# Altium PCB KOTROLER_TRANSPORTA.PcbDoc (part 1 of 4)
Units mm, origin at the board's own origin, x right, y up, seen from the top; angles counter-clockwise.
Board outline 160 x 100 mm, 2 copper layers (Top Layer, Bottom Layer); 436 components, 440 nets, 1414 pads, 154 vias.
Unrouted connection lines stored in the file: 1.
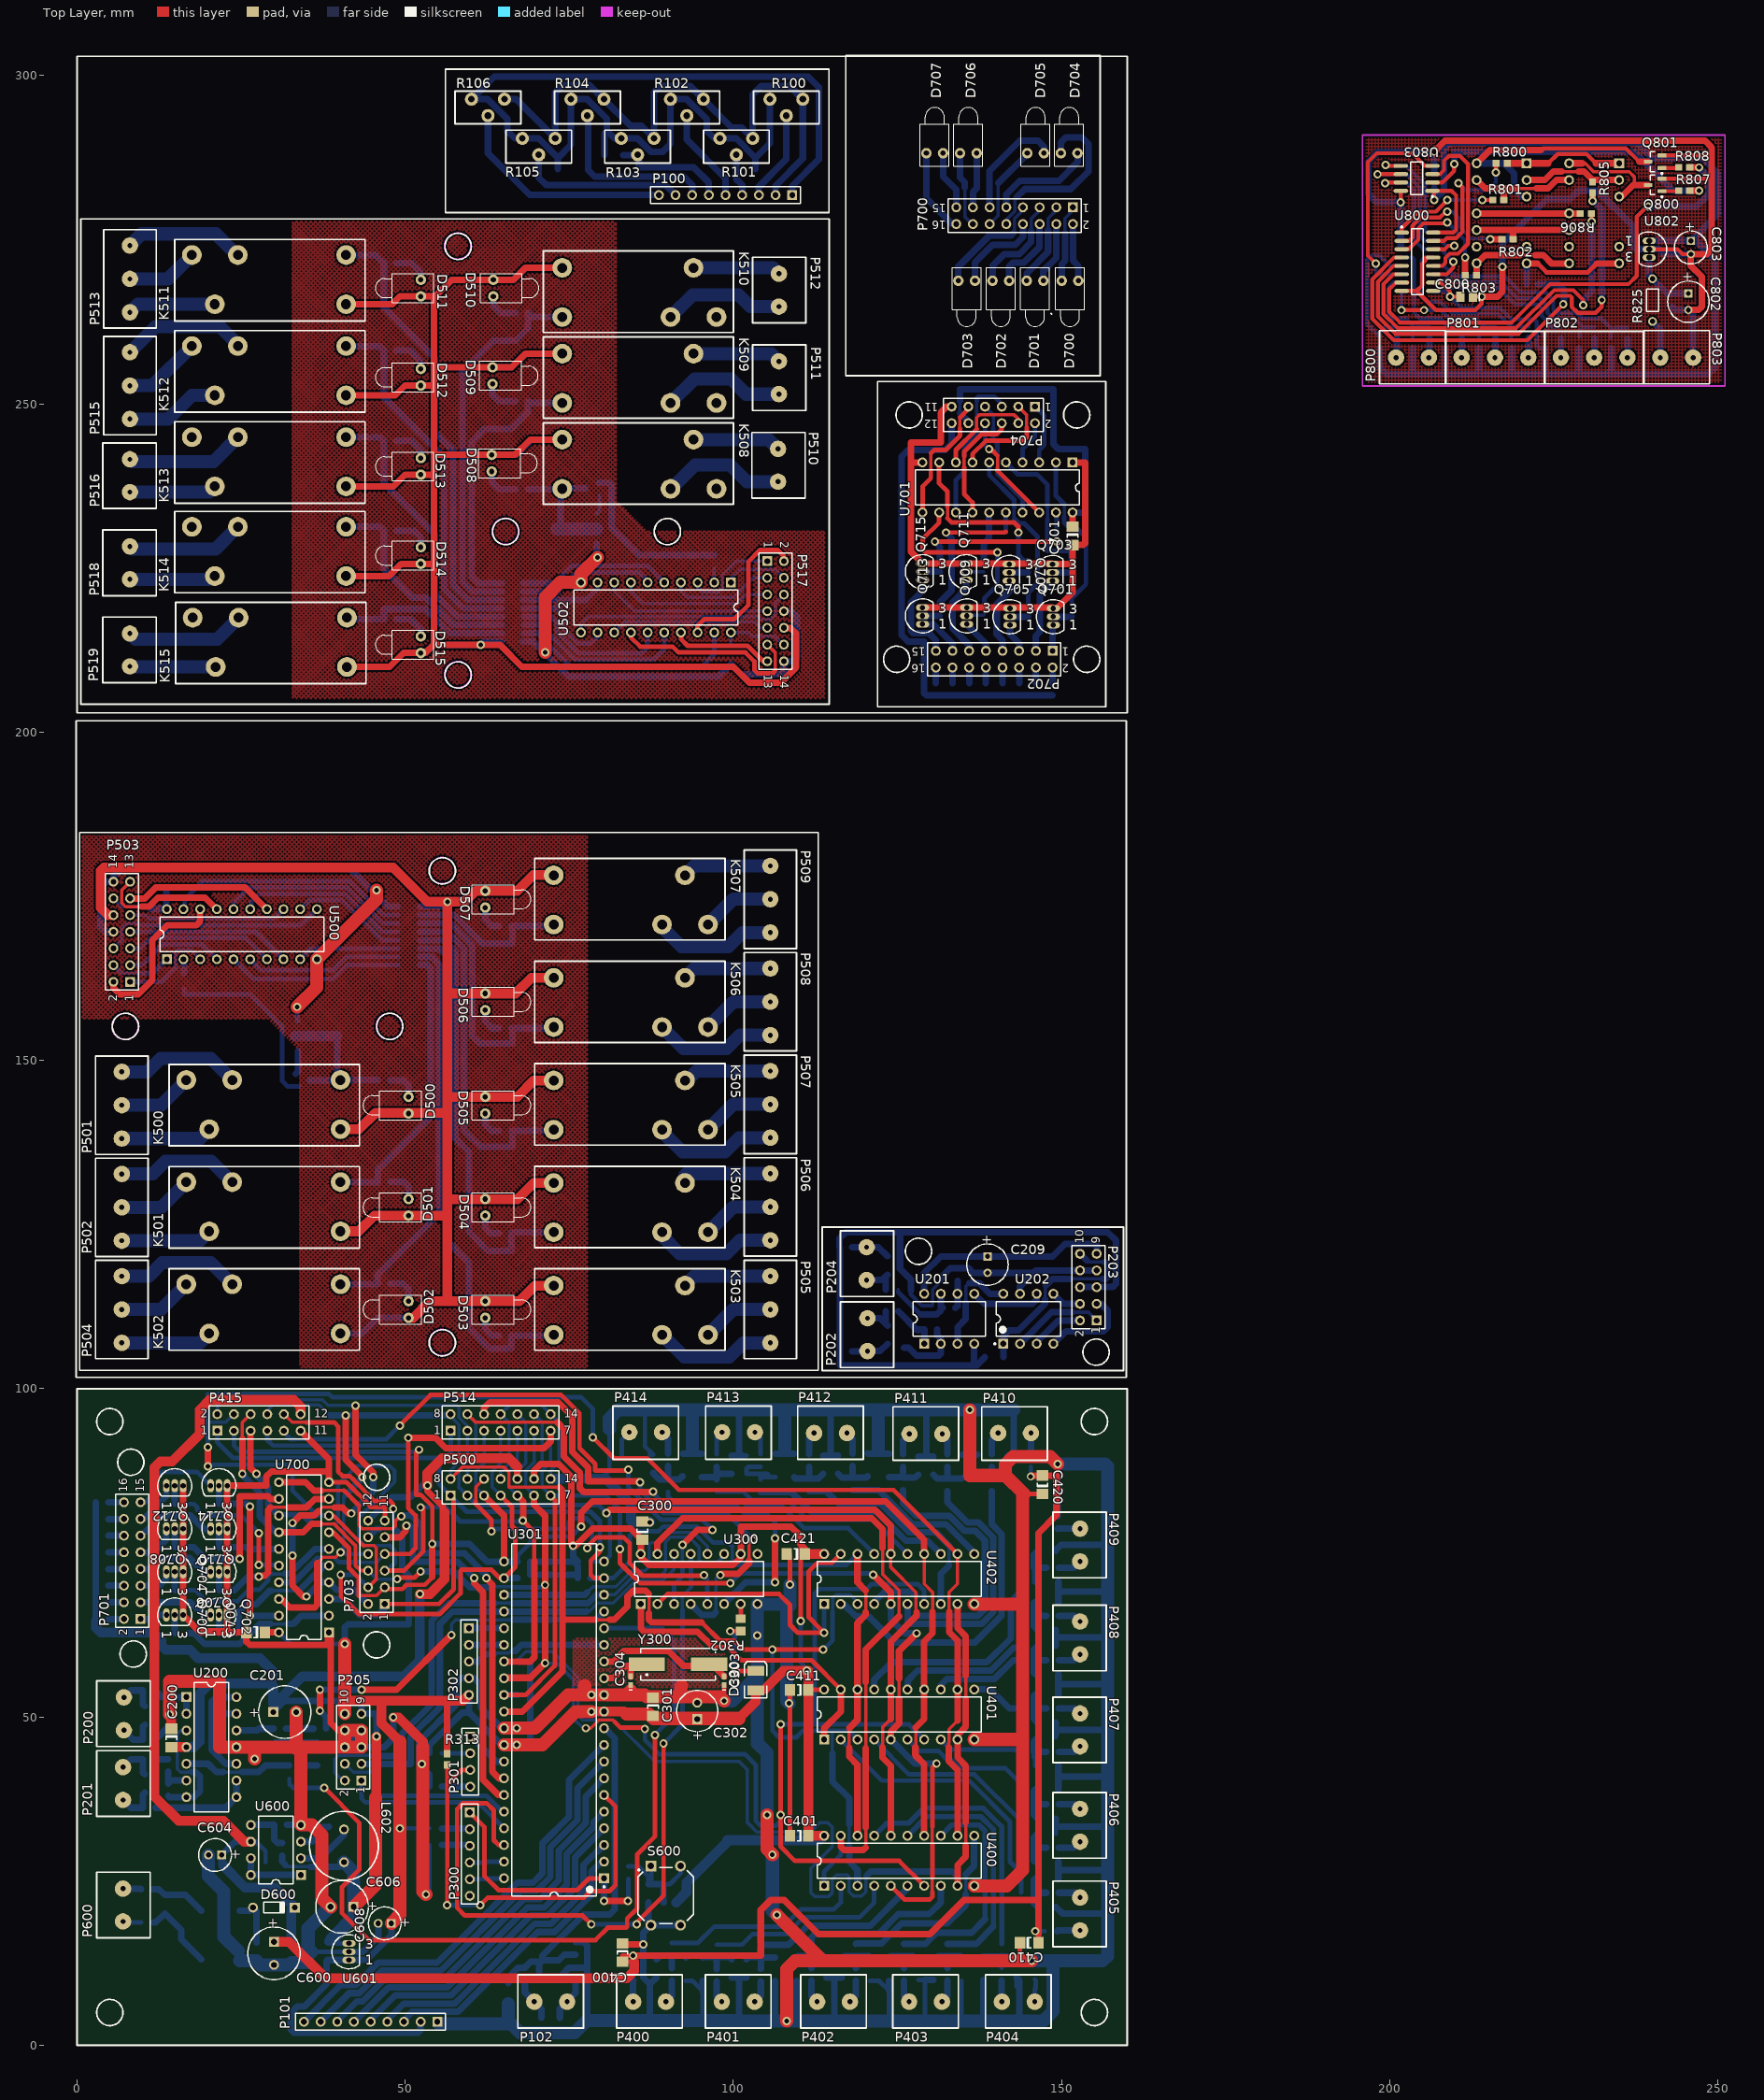
[diagram p0: Top Layer view]
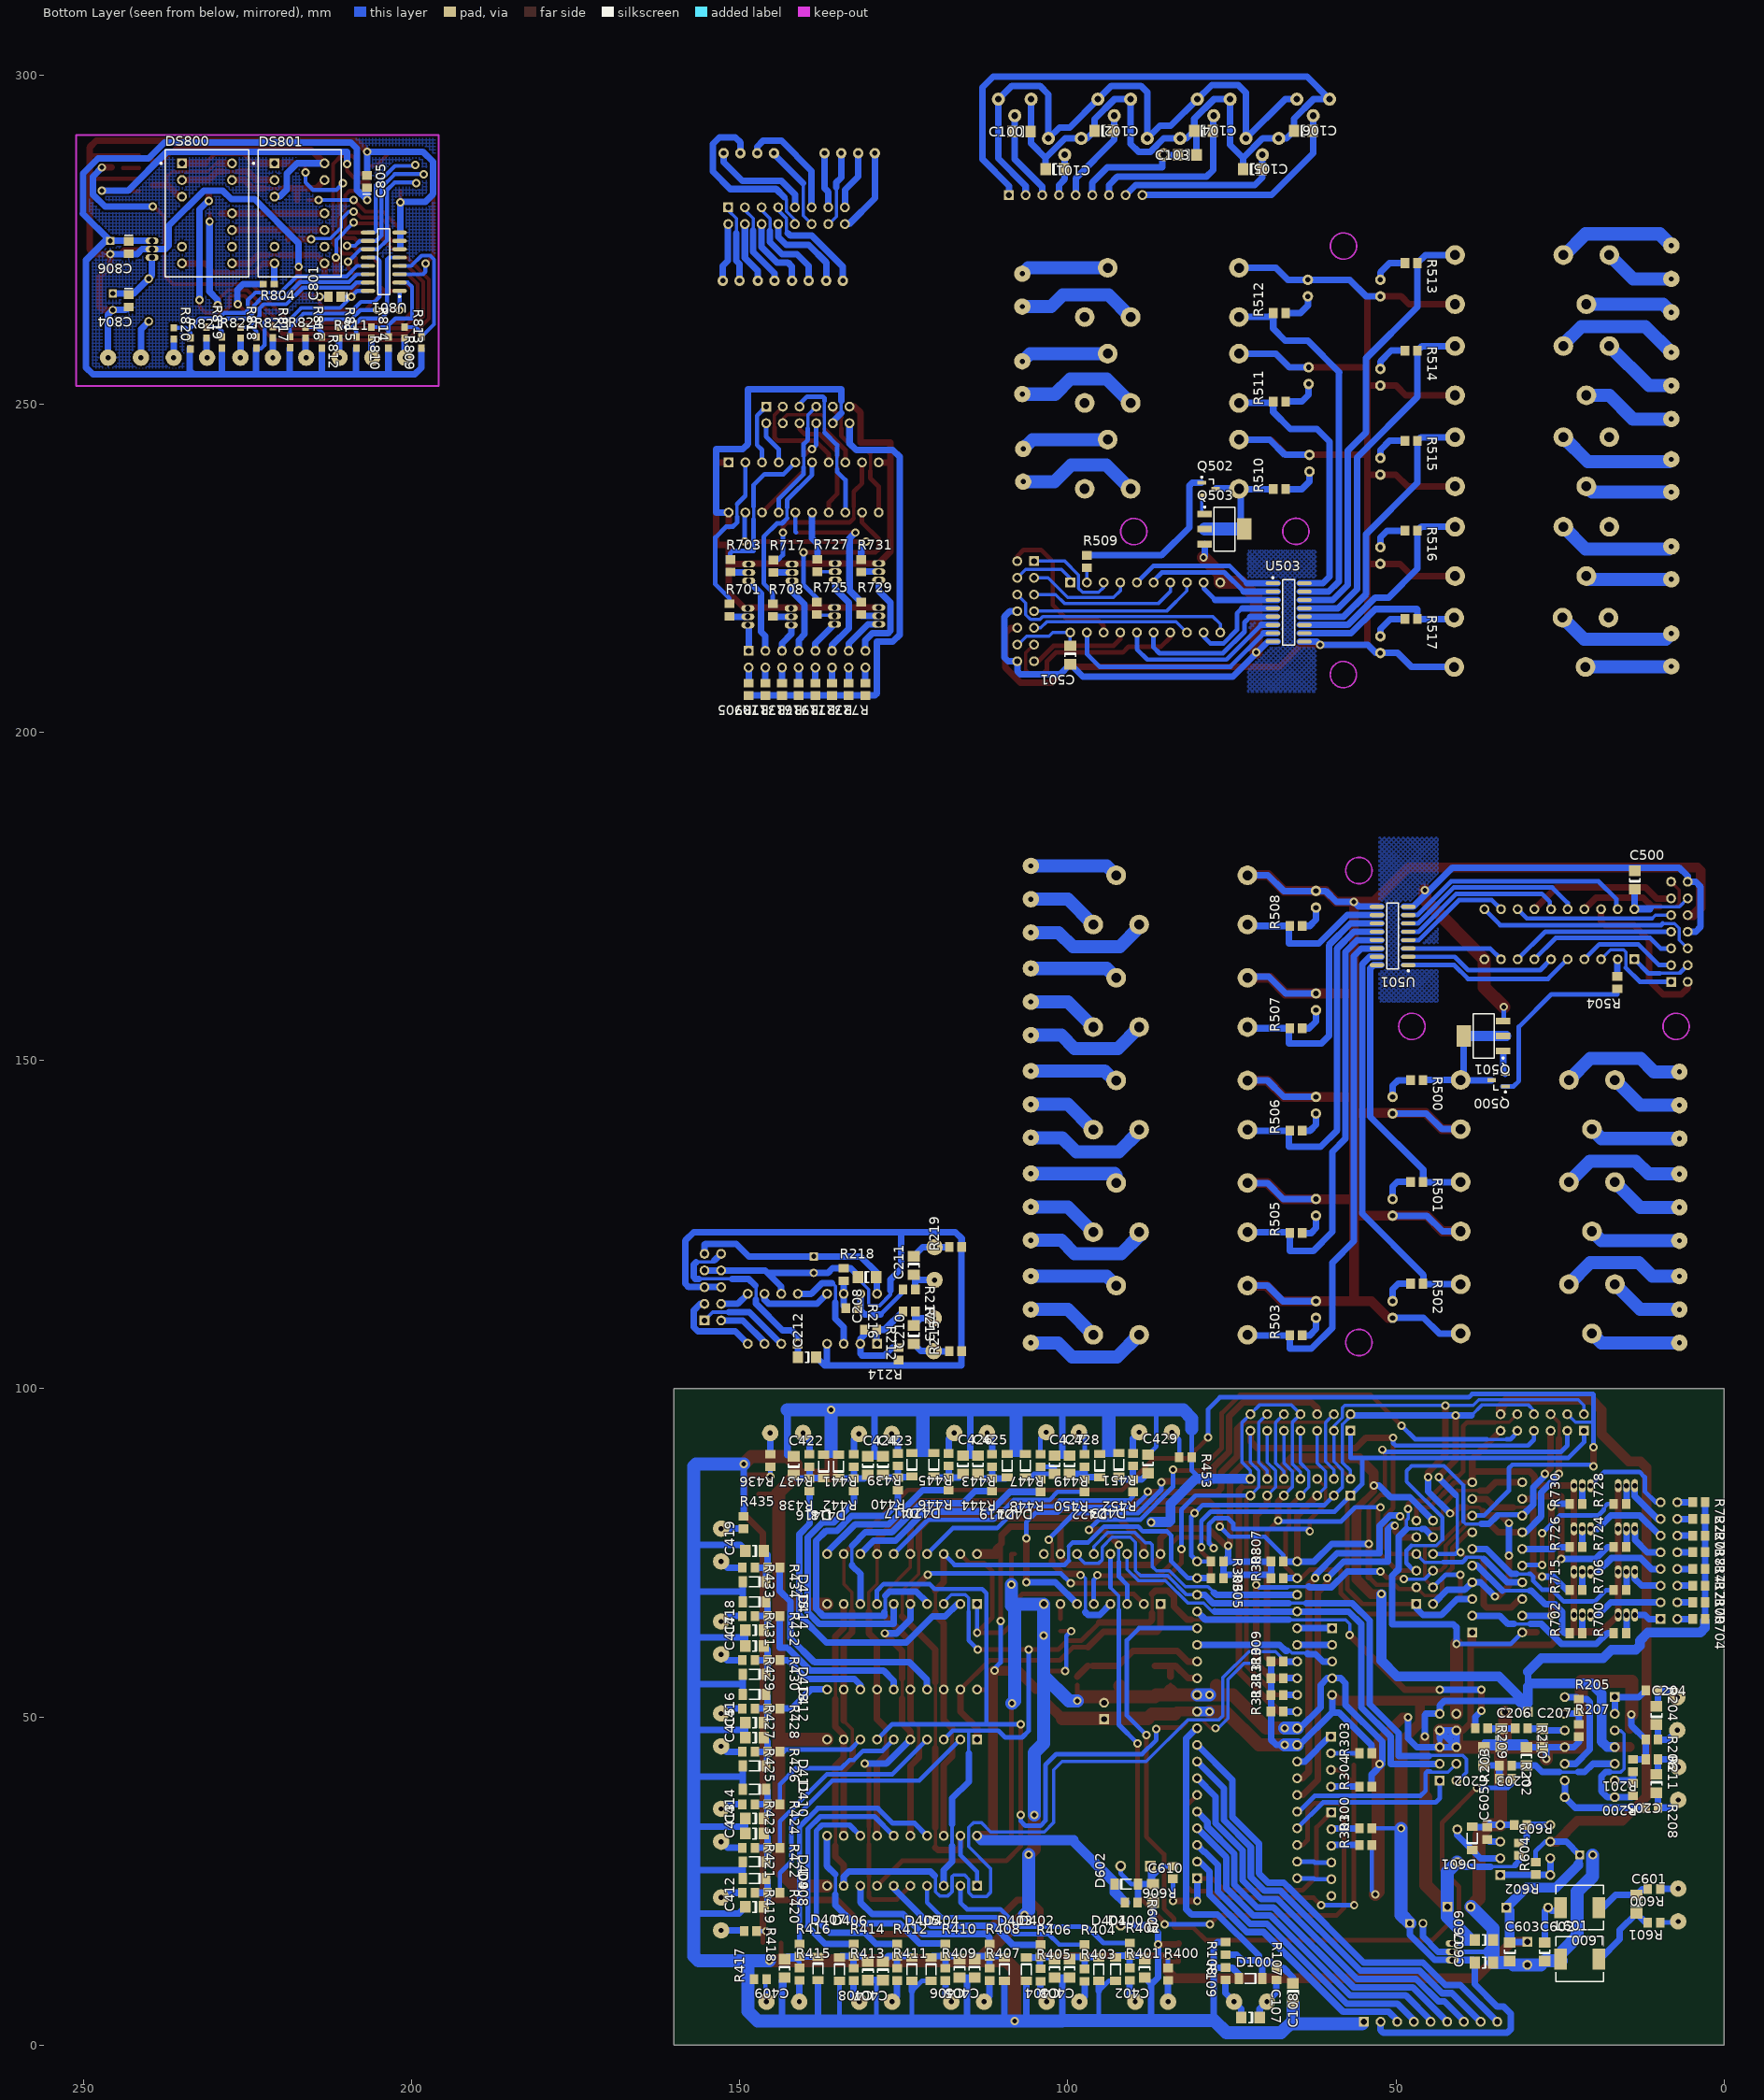
[diagram p1: Bottom Layer view, seen from below]

## Layer stack, top to bottom
Top Solder: solder mask 0.0102, Solder Resist, Dk 3.5
Top Layer: signal copper 0.0356
Dielectric1: dielectric 0.32, FR-4, Dk 4.8
Bottom Layer: signal copper 0.0356
Bottom Solder: solder mask 0.0102, Solder Resist, Dk 3.5

## Board outline
0,100 0,0 160,0 160,100 0,100

## Design rules (kind name [scope] priority, off if disabled: settings)
Clearance [All] p1: gap=0.254
PolygonConnect [All] p1: connectstyle=Relief reliefconductorwidth=0.254 reliefentries=4 polygonreliefangle="90 Angle" airgapwidth=0.254
RoutingVias [All] p1: holewidth=0.711 width=1.27 viastyle="Through Hole" minholewidth=0.711 minwidth=1.27 maxholewidth=0.711 maxwidth=1.27
SilkToSolderMaskClearance SilkscreenOverComponentPads [IsPad] p1: minsilkscreentomaskgap=0.254 clearancetoexposedcopper=TRUE
SolderMaskExpansion [All] p1: expansion=0.102
Width [All] p1: maxlimit=2 minlimit=0.2 preferedwidth=0.5
28 further rules are at their usual default settings.

## Classes and differential pairs
component class ERROR_DISPLAY: C800 C801 C802 C803 C804 C805 C806 DS800 DS801 P800 P801 P802 P803 Q800 Q801 R800 R801 R802 R803 R804 R805 R806 R807 R808 R809 R810 R811 R812 R813 R814 R815 R816 R817 R818 R819 R820 R821 R822 R823 R824 R825 U800 U801 U802 U803
component class SIGNAL_OUTPUT: C700 C701 D700 D701 D702 D703 D704 D705 D706 D707 P700 P701 P702 P703 P704 Q700 Q701 Q702 Q703 Q704 Q705 Q706 Q707 Q708 Q709 Q710 Q711 Q712 Q713 Q714 Q715 R700 R701 R702 R703 R704 R705 R706 R707 R708 R709 R710 R711 R712 R713 R714 R715 R716 R717 R718 R719 R720 R721 R722 R723 R724 R725 R726 R727 R728 R729 R730 R731 U700 U701
component class PSU: C600 C601 C602 C603 C604 C605 C606 C607 C608 C609 C610 D600 D601 D602 L600 L601 L602 P600 R600 R601 R602 R603 R604 R605 R606 S600 U600 U601
component class DIGITAL_OUTPUT: C500 C501 D500 D501 D502 D503 D504 D505 D506 D507 D508 D509 D510 D511 D512 D513 D514 D515 K500 K501 K502 K503 K504 K505 K506 K507 K508 K509 K510 K511 K512 K513 K514 K515 P500 P501 P502 P503 P504 P505 P506 P507 P508 P509 P510 P511 P512 P513 P514 P515 P516 P517 P518 P519 Q500 Q501 Q502 Q503 R500 R501 R502 R503 R504 R505 R506 R507 R508 R509 R510 R511 R512 R513 R514 R515 R516 R517 U500 U501 U502 U503
component class ANALOG_INPUT: C100 C101 C102 C103 C104 C105 C106 C107 C108 D100 P100 P101 P102 R100 R101 R102 R103 R104 R105 R106 R107 R108 R109
component class DIGITAL_INPUT: C400 C401 C402 C403 C404 C405 C406 C407 C408 C409 C410 C411 C412 C413 C414 C415 C416 C417 C418 C419 C420 C421 C422 C423 C424 C425 C426 C427 C428 C429 D400 D401 D402 D403 D404 D405 D406 D407 D408 D409 D410 D411 D412 D413 D414 D415 D416 D417 D418 D419 D420 D421 D422 D423 P400 P401 P402 P403 P404 P405 P406 P407 P408 P409 P410 P411 P412 P413 P414 P415 R400 R401 R402 R403 R404 R405 R406 R407 R408 R409 R410 R411 R412 R413 R414 R415 R416 R417 R418 R419 R420 R421 R422 R423 R424 R425 R426 R427 R428 R429 R430 R431 R432 R433 R434 R435 R436 R437 R438 R439 R440 R441 R442 R443 R444 R445 R446 R447 R448 R449 R450 R451 R452 R453 U400 U401 U402
component class CUC: C300 C301 C302 C303 C304 D300 P300 P301 P302 R300 R301 R302 R303 R304 R305 R306 R307 R308 R309 R310 R311 R312 R313 U300 U301 Y300
component class ANALOG_OUTPUT: C200 C201 C202 C203 C204 C205 C206 C207 C208 C209 C210 C211 C212 P200 P201 P202 P203 P204 P205 R200 R201 R202 R203 R204 R205 R206 R207 R208 R209 R210 R211 R212 R213 R214 R215 R216 R217 R218 R219 U200 U201 U202

## Components (designator, comment, footprint, x,y, rotation, side; value= is the part's Value field where it differs from the comment)
C100 "" 1206 107.061,291.465 r0 bottom
C101 "" 1206 101.981,285.75 r180 bottom
C102 "" 1206 94.53,291.592 r180 bottom
C103 "" 1206 81.788,287.909 r0 bottom
C104 "" 1206 79.333,291.592 r180 bottom
C105 "" 1206 71.882,285.75 r180 bottom
C106 "" 1206 64.135,291.592 r180 bottom
C107 "" 1206 72.169,4.224 r0 bottom
C108 "" 1206 65.692,8.034 r270 bottom
C200 "" 1206 14.384,46.816 r270 top
C201 "10uF" E 31.656,50.753 r0 top
C202 "" 1206 36.609,44.022 r270 bottom
C203 "" 1206 30.132,44.022 r270 bottom
C204 "" 1206 10.32,50.245 r90 bottom
C205 "" 1206 10.32,39.871 r270 bottom
C206 "" 1206 33.942,46.816 r90 bottom
C207 "" 1206 27.719,46.816 r90 bottom
C208 "" 1206 130.589,117 r180 bottom
C209 "10uF" CAPPR2.5-6.3X7 138.717,118.905 r270 top
C210 "" 1206 123.477,108.237 r90 bottom
C211 "" 1206 123.477,118.778 r270 bottom
C212 "" 1206 139.733,104.808 r0 bottom
C300 "" 1206 86.139,78.392 r90 top
C301 "" 1206 87.757,51.562 r270 top
C302 "4u7" 94SP-C 94.488,50.927 r90 top
C303 "" 0402 98.585,55.532 r90 top
C304 "" 0402 84.361,55.532 r90 top
C400 "" 1206 83.091,14.13 r270 top
C401 "" 1206 110.015,31.91 r180 top
C402 "" 1206 88.298,11.717 r270 bottom
C403 "" 1206 99.728,11.717 r270 bottom
C404 "" 1206 102.014,11.717 r270 bottom
C405 "" 1206 114.206,11.717 r270 bottom
C406 "" 1206 116.492,11.717 r270 bottom
C407 "" 1206 128.176,11.336 r270 bottom
C408 "" 1206 130.462,11.336 r270 bottom
C409 "" 1206 143.162,11.717 r270 bottom
C410 "" 1206 145.067,15.618 r0 top
C411 "" 1206 110.015,54.135 r180 top
C412 "" 1206 147.734,21.079 r0 bottom
C413 "" 1206 147.734,32.255 r0 bottom
C414 "" 1206 147.734,34.541 r0 bottom
C415 "" 1206 147.734,46.86 r0 bottom
C416 "" 1206 147.734,49.146 r0 bottom
C417 "" 1206 147.734,60.83 r0 bottom
C418 "" 1206 147.734,63.243 r0 bottom
C419 "" 1206 147.734,75.308 r0 bottom
C420 "" 1206 147.099,85.377 r90 top
C421 "" 1206 109.507,74.836 r180 top
C422 "" 1206 141.765,88.298 r90 bottom
C423 "" 1206 128.176,88.298 r90 bottom
C424 "" 1206 130.462,88.298 r90 bottom
C425 "" 1206 113.698,88.425 r90 bottom
C426 "" 1206 115.984,88.425 r90 bottom
C427 "" 1206 102.014,88.425 r90 bottom
C428 "" 1206 99.728,88.425 r90 bottom
C429 "" 1206 87.79,88.552 r90 bottom
C500 "" 1206 13.622,177.475 r90 bottom
C501 "" 1206 99.63,211.757 r270 bottom
C600 "220uF" E 30.005,14.003 r270 top
C601 "" 1206 13.368,21.496 r90 bottom
C602 "" 1206 27.338,14.257 r90 bottom
C603 "" 1206 32.672,14.257 r90 bottom
C604 "100uF" CAPPR2-5X11 21.028,28.989 r180 top
C605 "" 0805 36.101,32.291 r270 bottom
C606 "220uF" E 40.386,21.082 r180 top
C607 "" 1206 36.609,12.606 r0 bottom
C608 "470uF" CAPPR2-5X11 46.896,18.575 r180 top
C609 "" 1206 36.609,16.035 r0 bottom
C610 "" 1206 87.028,23.147 r90 bottom
C700 "" 1206 27.211,62.898 r180 top
C701 "" 1206 151.671,229.903 r270 top
C800 "" 0805 211.709,266.319 r180 top
C801 "" 0805 211.709,266.319 r0 bottom
C802 "100uF" C 245.491,265.557 r270 top
C803 "4u7" B 245.872,273.812 r270 top
C804 "" 0805 243.078,265.684 r270 bottom
C805 "" 0805 206.756,283.845 r90 bottom
C806 "" 0805 243.078,273.812 r270 bottom
D100 "5V1" SOD80C 72.169,10.193 r180 bottom
D300 "STATUS" 3.5X2.8X1.9 103.411,55.532 r90 top
D400 "5V1" SOD80C 92.743,11.59 r90 bottom
D401 "5V1" SOD80C 95.283,11.59 r90 bottom
D402 "5V1" SOD80C 106.332,11.59 r90 bottom
D403 "5V1" SOD80C 109.634,11.59 r90 bottom
D404 "5V1" SOD80C 120.81,11.59 r90 bottom
D405 "5V1" SOD80C 123.731,11.59 r90 bottom
D406 "5V1" SOD80C 134.78,11.59 r90 bottom
D407 "5V1" SOD80C 138.082,11.717 r90 bottom
D408 "5V1" SOD80C 147.734,25.397 r180 bottom
D409 "5V1" SOD80C 147.734,27.937 r180 bottom
D410 "5V1" SOD80C 147.734,38.986 r180 bottom
D411 "5V1" SOD80C 147.734,42.542 r180 bottom
D412 "5V1" SOD80C 147.734,53.464 r180 bottom
D413 "5V1" SOD80C 147.734,56.512 r180 bottom
D414 "5V1" SOD80C 147.734,67.561 r180 bottom
D415 "5V1" SOD80C 147.734,70.609 r180 bottom
D416 "5V1" SOD80C 137.193,88.171 r270 bottom
D417 "5V1" SOD80C 123.731,88.425 r270 bottom
D418 "5V1" SOD80C 134.907,88.171 r270 bottom
D419 "5V1" SOD80C 109.253,88.298 r270 bottom
D420 "5V1" SOD80C 120.429,88.425 r270 bottom
D421 "5V1" SOD80C 106.459,88.298 r270 bottom
D422 "5V1" SOD80C 95.156,88.298 r270 bottom
D423 "5V1" SOD80C 92.235,88.425 r270 bottom
D500 "LED1" LED-1 50.516,143.185 r180 top
D501 "LED1" LED-1 50.516,127.628 r180 top
D502 "LED1" LED-1 50.516,112.07 r180 top
D503 "LED1" LED-1 62.2,112.07 r0 top
D504 "LED1" LED-1 62.2,127.628 r0 top
D505 "LED1" LED-1 62.2,143.185 r0 top
D506 "LED1" LED-1 62.2,158.933 r0 top
D507 "LED1" LED-1 62.2,174.554 r0 top
D508 "LED1" LED-1 63.181,240.967 r0 top
D509 "LED1" LED-1 63.308,254.302 r0 top
D510 "LED1" LED-1 63.435,267.637 r0 top
D511 "LED1" LED-1 52.386,267.637 r180 top
D512 "LED1" LED-1 52.386,254.061 r180 top
D513 "LED1" LED-1 52.386,240.484 r180 top
D514 "LED1" LED-1 52.386,226.908 r180 top
D515 "LED1" LED-1 52.386,213.331 r180 top
D600 "BAT85" SOD68 30.005,20.988 r0 top
D601 "BAV102" SOD80C 38.387,31.529 r270 bottom
D602 "BAV102" SOD80C 91.092,24.544 r0 bottom
D700 "FEEDER 1" LED-1 151.29,268.754 r270 top
D701 "FEEDER 2" LED-1 145.956,268.754 r270 top
D702 "FEEDER 3" LED-1 140.749,268.754 r270 top
D703 "FEEDER 4" LED-1 135.542,268.754 r270 top
D704 "FEEDER 5" LED-1 151.163,288.185 r90 top
D705 "FEEDER KOEX." LED-1 146.041,288.185 r90 top
D706 "VAKUM PUMPA 1" LED-1 135.796,288.185 r90 top
D707 "CIKLON" LED-1 130.674,288.185 r90 top
DS800 "5082-7653" E-11(R) 231.14,279.019 r180 bottom
DS801 "5082-7653" E-11(R) 217.043,279.019 r180 bottom
K500 "40.31" "40.31 FINDER" 43.15,149.485 r180 top
K501 "40.31" "40.31 FINDER" 43.15,133.928 r180 top
K502 "40.31" "40.31 FINDER" 43.15,118.37 r180 top
K503 "40.31" "40.31 FINDER" 69.629,105.77 r0 top
K504 "40.31" "40.31 FINDER" 69.629,121.391 r0 top
K505 "40.31" "40.31 FINDER" 69.629,137.012 r0 top
K506 "40.31" "40.31 FINDER" 69.629,152.633 r0 top
K507 "40.31" "40.31 FINDER" 69.629,168.254 r0 top
K508 "40.31" "40.31 FINDER" 70.928,234.617 r0 top
K509 "40.31" "40.31 FINDER" 70.928,247.698 r0 top
K510 "40.31" "40.31 FINDER" 70.928,260.779 r0 top
K511 "40.31" "40.31 FINDER" 44.004,275.13 r180 top
K512 "40.31" "40.31 FINDER" 44.004,261.255 r180 top
K513 "40.31" "40.31 FINDER" 44.004,247.381 r180 top
K514 "40.31" "40.31 FINDER" 44.004,233.728 r180 top
K515 "40.31" "40.31 FINDER" 44.131,219.885 r180 top
L600 "" PCMC063T 22.004,20.988 r0 bottom
L601 "" PCMC063T 22.004,13.114 r180 bottom
L602 "" RB5-10.5 40.673,30.386 r270 top
P100 "Header 9" HDR1X9 108.966,281.813 r180 top
P101 "Header 9" HDR1X9 54.897,3.589 r180 top
P102 "AN0" "TERMINAL BLOK 2" 72.169,6.637 r90 top
P200 "AN1" "TERMINAL BLOK 2" 7.145,50.499 r180 top
P201 "AN0" "TERMINAL BLOK 2" 7.018,39.871 r0 top
P202 "AN2" "TERMINAL BLOK 2" 120.429,108.237 r180 top
P203 "Header 5X2" HDR2X5 155.354,110.396 r90 top
P204 "AN3" "TERMINAL BLOK 2" 120.302,119.061 r0 top
P205 "Header 5X2" HDR2X5 43.34,40.339 r90 top
P300 "Header 6" HDR1X6 59.85,35.466 r270 top
P301 "Header 4" HDR1X4 59.914,47.023 r270 top
P302 "Header 5" HDR1X5 59.723,63.533 r270 top
P400 "Terminal blok 2 pina" "TERMINAL BLOK 2" 87.228,6.637 r90 top
P401 "Terminal blok 2 pina" "TERMINAL BLOK 2" 100.735,6.637 r90 top
P402 "Terminal blok 2 pina" "TERMINAL BLOK 2" 115.258,6.637 r90 top
P403 "Terminal blok 2 pina" "TERMINAL BLOK 2" 129.274,6.637 r90 top
P404 "Terminal blok 2 pina" "TERMINAL BLOK 2" 143.416,6.637 r90 top
P405 "Terminal blok 2 pina" "TERMINAL BLOK 2" 152.814,20.008 r180 top
P406 "Terminal blok 2 pina" "TERMINAL BLOK 2" 152.814,33.516 r180 top
P407 "Terminal blok 2 pina" "TERMINAL BLOK 2" 152.814,48.039 r180 top
P408 "Terminal blok 2 pina" "TERMINAL BLOK 2" 152.814,62.054 r180 top
P409 "Terminal blok 2 pina" "TERMINAL BLOK 2" 152.814,76.197 r180 top
P410 "Terminal blok 2 pina" "TERMINAL BLOK 2" 142.835,93.251 r270 top
P411 "Terminal blok 2 pina" "TERMINAL BLOK 2" 129.328,93.124 r90 top
P412 "Terminal blok 2 pina" "TERMINAL BLOK 2" 114.805,93.251 r90 top
P413 "Terminal blok 2 pina" "TERMINAL BLOK 2" 100.789,93.378 r270 top
P414 "Terminal blok 2 pina" "TERMINAL BLOK 2" 86.647,93.378 r270 top
P415 "Header 6X2" HDR2X6 21.369,93.595 r0 top
P500 "Header 7X2A" HDR2X7_CEN 56.929,83.726 r0 top
P501 "O2_OUTPUT0" "TERMINAL BLOK" 6.828,143.185 r0 top
P502 "O2_OUTPUT1" "TERMINAL BLOK" 6.828,127.628 r0 top
P503 "Header 7X2" HDR2X7 8.098,161.981 r90 top
P504 "O2_OUTPUT2" "TERMINAL BLOK" 6.828,112.07 r0 top
P505 "O2_OUTPUT3" "TERMINAL BLOK" 105.634,112.07 r180 top
P506 "O2_OUTPUT4" "TERMINAL BLOK" 105.634,127.691 r180 top
P507 "O2_OUTPUT5" "TERMINAL BLOK" 105.634,143.312 r180 top
P508 "O2_OUTPUT6" "TERMINAL BLOK" 105.634,158.933 r180 top
P509 "O2_OUTPUT7" "TERMINAL BLOK" 105.634,174.554 r180 top
P510 "O1_OUTPUT0" "TERMINAL BLOK 2" 106.806,240.65 r0 top
P511 "O1_OUTPUT1" "TERMINAL BLOK 2" 106.933,253.985 r0 top
P512 "O1_OUTPUT2" "TERMINAL BLOK 2" 106.933,267.32 r0 top
P513 "O1_OUTPUT3" "TERMINAL BLOK" 8.063,269.034 r0 top
P514 "Header 7X2A" HDR2X7_CEN 56.929,93.595 r0 top
P515 "O1_OUTPUT4" "TERMINAL BLOK" 8.063,252.778 r0 top
P516 "O1_OUTPUT5" "TERMINAL BLOK 2" 8.063,239.062 r180 top
P517 "Header 7X2" HDR2X7 105.155,226.045 r270 top
P518 "O1_OUTPUT5" "TERMINAL BLOK 2" 8.063,225.791 r180 top
P519 "O1_OUTPUT6" "TERMINAL BLOK 2" 8.063,212.519 r180 top
P600 "PWR_24Vdc" "TERMINAL BLOK 2" 7.018,21.369 r0 top
P700 "Header 8X2" HDR2X8 151.737,279.93 r180 top
P701 "Header 8X2" HDR2X8 9.685,64.93 r90 top
P702 "Header 8X2" HDR2X8 148.623,212.377 r180 top
P703 "Header 6X2" HDR2X6 46.896,67.216 r90 top
P704 "Header 6X2" HDR2X6 145.956,249.588 r180 top
P800 "" "TERMINAL BLOK 2" 203.454,257.048 r90 top
P801 "" "TERMINAL BLOK" 216.027,257.048 r270 top
P802 "" "TERMINAL BLOK" 231.14,257.048 r270 top
P803 "" "TERMINAL BLOK 2" 243.713,257.048 r90 top
Q500 "BC817-16" SOT23_N 34.387,146.995 r0 bottom
Q501 "BCP54-16" SOT223_N 36.673,153.726 r0 bottom
Q502 "BC817-16" SOT23_N 78.548,237.03 r180 bottom
Q503 "BCP54-16" SOT223_N 76.135,230.934 r180 bottom
Q700 "BC337" 29-04#1 14.892,65.55 r270 top
Q701 "BC337" 29-04#1 148.75,217.584 r0 top
Q702 "BC337" 29-04#1 21.623,65.55 r270 top
Q703 "BC337" 29-04#1 148.623,224.315 r0 top
Q704 "BC337" 29-04#1 14.892,72.112 r270 top
Q705 "BC337" 29-04#1 142.146,217.584 r0 top
Q706 "BC337" 29-04#1 21.623,72.112 r270 top
Q707 "BC337" 29-04#1 142.019,224.315 r0 top
Q708 "BC337" 29-04#1 14.892,78.673 r270 top
Q709 "BC337" 29-04#1 135.542,217.711 r0 top
Q710 "BC337" 29-04#1 21.623,78.673 r270 top
Q711 "BC337" 29-04#1 135.457,224.442 r0 top
Q712 "BC337" 29-04#1 14.892,85.235 r270 top
Q713 "BC337" 29-04#1 128.811,217.711 r0 top
Q714 "BC337" 29-04#1 21.623,85.235 r270 top
Q715 "BC337" 29-04#1 128.811,224.442 r0 top
Q800 "BC817-40" SOT23_N 240.411,283.337 r180 top
Q801 "BC817-40" SOT23_N 240.411,286.893 r180 top
R100 "100K" Poti 108.077,295.148 r180 top
R101 "100K" Poti 100.457,289.179 r180 top
R102 "100K" Poti 92.922,295.148 r180 top
R103 "100K" Poti 85.407,289.179 r180 top
R104 "100K" Poti 77.766,295.148 r180 top
R105 "100K" Poti 70.358,289.179 r180 top
R106 "100K" Poti 62.611,295.148 r180 top
R107 "10K" ERA-0805 68.232,10.893 r270 bottom
R108 "2K7" ERA-0805 75.979,14.765 r90 bottom
R109 "10R" ERA-0805 75.979,10.893 r270 bottom
R200 "10K" ERA-0805 13.876,38.942 r270 bottom
R201 "10K" ERA-0805 13.876,42.625 r270 bottom
R202 "1K" ERA-0805 33.307,42.625 r180 bottom
R203 "1K" ERA-0805 33.307,40.593 r0 bottom
R204 "10R" ERA-0805 11.02,54.055 r180 bottom
R205 "10K" ERA-0805 22.131,51.769 r90 bottom
R206 "10R" ERA-0805 11.02,46.562 r180 bottom
R207 "10K" ERA-0805 22.131,47.959 r90 bottom
R208 "10R" ERA-0805 11.02,36.188 r180 bottom
R209 "1K" ERA-0805 36.99,48.266 r180 bottom
R210 "1K" ERA-0805 30.894,48.266 r180 bottom
R211 "10R" ERA-0805 11.02,43.554 r180 bottom
R212 "10K" ERA-0805 130.081,108.999 r180 bottom
R213 "10R" ERA-0805 124.177,111.793 r180 bottom
R214 "10K" ERA-0805 125.763,105.316 r270 bottom
R215 "10R" ERA-0805 117.127,105.697 r0 bottom
R216 "10K" ERA-0805 132.875,112.301 r180 bottom
R217 "10R" ERA-0805 124.177,115.095 r180 bottom
R218 "10K" ERA-0805 134.145,117.381 r90 bottom
R219 "10R" ERA-0805 117.127,121.572 r0 bottom
R300 "1R" ERA-0805 54.643,33.053 r0 bottom
R301 "1R" ERA-0805 54.643,30.513 r0 bottom
R302 "470R" ERA-0805 101.125,64.041 r270 top
R303 "1R" ERA-0805 54.643,44.483 r0 bottom
R304 "1R" ERA-0805 54.643,39.403 r0 bottom
R305 "1K" ERA-0805 77.249,71.153 r180 bottom
R306 "1K" ERA-0805 77.249,73.693 r180 bottom
R307 "1K" ERA-0805 68.105,73.693 r0 bottom
R308 "1K" ERA-0805 68.105,71.153 r0 bottom
R309 "1K" ERA-0805 68.105,58.453 r0 bottom
R310 "1K" ERA-0805 68.105,55.913 r0 bottom
R311 "1K" ERA-0805 68.105,53.373 r0 bottom
R312 "1K" ERA-0805 68.105,50.833 r0 bottom
R313 "10K" ERA-0603 56.388,43.561 r90 top
R400 "10R" ERA-0805 84.742,10.828 r90 bottom
R401 "10K" ERA-0805 90.584,10.828 r90 bottom
R402 "1K" ERA-0805 90.584,14.638 r90 bottom
R403 "10K" ERA-0805 97.442,10.68 r90 bottom
R404 "1K" ERA-0805 97.442,14.384 r90 bottom
R405 "10K" ERA-0805 104.173,10.701 r90 bottom
R406 "1K" ERA-0805 104.173,14.384 r90 bottom
R407 "10K" ERA-0805 111.92,10.807 r90 bottom
R408 "1K" ERA-0805 111.92,14.511 r90 bottom
R409 "10K" ERA-0805 118.651,10.807 r90 bottom
R410 "1K" ERA-0805 118.651,14.511 r90 bottom
R411 "10K" ERA-0805 126.017,10.807 r90 bottom
R412 "1K" ERA-0805 126.017,14.511 r90 bottom
R413 "10K" ERA-0805 132.621,10.807 r90 bottom
R414 "1K" ERA-0805 132.621,14.511 r90 bottom
R415 "10K" ERA-0805 140.876,10.828 r90 bottom
R416 "1K" ERA-0805 140.876,14.511 r90 bottom
R417 "10R" ERA-0805 146.845,10.066 r0 bottom
R418 "10R" ERA-0805 148.369,17.396 r180 bottom
R419 "10K" ERA-0805 148.623,23.238 r180 bottom
R420 "1K" ERA-0805 144.813,23.238 r180 bottom
R421 "10K" ERA-0805 148.623,30.096 r180 bottom
R422 "1K" ERA-0805 144.813,30.096 r180 bottom
R423 "10K" ERA-0805 148.623,36.7 r180 bottom
R424 "1K" ERA-0805 144.813,36.7 r180 bottom
R425 "10K" ERA-0805 148.623,44.701 r180 bottom
R426 "1K" ERA-0805 144.813,44.701 r180 bottom
R427 "10K" ERA-0805 148.623,51.305 r180 bottom
R428 "1K" ERA-0805 144.813,51.305 r180 bottom
R429 "10K" ERA-0805 148.623,58.671 r180 bottom
R430 "1K" ERA-0805 144.813,58.671 r180 bottom
R431 "10K" ERA-0805 148.623,65.402 r180 bottom
R432 "1K" ERA-0805 144.813,65.402 r180 bottom
R433 "10K" ERA-0805 148.623,72.768 r180 bottom
R434 "1K" ERA-0805 144.813,72.768 r180 bottom
R435 "10R" ERA-0805 149.385,79.626 r90 bottom
R436 "10R" ERA-0805 145.321,89.06 r270 bottom
R437 "10K" ERA-0805 139.352,89.06 r270 bottom
R438 "1K" ERA-0805 139.352,85.377 r270 bottom
R439 "10K" ERA-0805 125.89,89.187 r270 bottom
R440 "1K" ERA-0805 125.89,85.504 r270 bottom
R441 "10K" ERA-0805 132.621,89.06 r270 bottom
R442 "1K" ERA-0805 132.621,85.377 r270 bottom
R443 "10K" ERA-0805 111.539,89.06 r270 bottom
R444 "1K" ERA-0805 111.539,85.377 r270 bottom
R445 "10K" ERA-0805 118.143,89.187 r270 bottom
R446 "1K" ERA-0805 118.143,85.504 r270 bottom
R447 "10K" ERA-0805 104.173,89.06 r270 bottom
R448 "1K" ERA-0805 104.173,85.25 r270 bottom
R449 "10K" ERA-0805 97.442,89.06 r270 bottom
R450 "1K" ERA-0805 97.442,85.25 r270 bottom
R451 "10K" ERA-0805 90.076,89.187 r270 bottom
R452 "1K" ERA-0805 90.076,85.25 r270 bottom
R453 "10R" ERA-0805 82.075,89.568 r180 bottom
R500 "1K" ERA-0805 46.833,146.995 r180 bottom
R501 "1K" ERA-0805 46.833,131.501 r180 bottom
R502 "1K" ERA-0805 46.833,116.007 r180 bottom
R503 "1K" ERA-0805 65.248,108.133 r0 bottom
R504 "1K" ERA-0805 16.289,161.854 r270 bottom
R505 "1K" ERA-0805 65.248,123.722 r0 bottom
R506 "1K" ERA-0805 65.248,139.312 r0 bottom
R507 "1K" ERA-0805 65.248,154.901 r0 bottom
R508 "1K" ERA-0805 65.248,170.49 r0 bottom
R509 "1K" ERA-0805 97.09,225.981 r90 bottom
R510 "1K" ERA-0805 67.753,237.03 r0 bottom
R511 "1K" ERA-0805 67.753,250.365 r0 bottom
R512 "1K" ERA-0805 67.753,263.827 r0 bottom
R513 "1K" ERA-0805 47.687,271.447 r180 bottom
R514 "1K" ERA-0805 47.687,258.112 r180 bottom
R515 "1K" ERA-0805 47.687,244.396 r180 bottom
R516 "1K" ERA-0805 47.687,230.68 r180 bottom
R517 "1K" ERA-0805 47.687,217.218 r180 bottom
R600 "1R" ERA-0805 10.701,23.782 r180 bottom
R601 "1R" ERA-0805 10.701,18.702 r180 bottom
R602 "0R33" ERA-0805 28.735,26.957 r270 bottom
R603 "10K" ERA-0805 31.275,29.878 r270 bottom
R604 "10K" ERA-0805 31.021,33.561 r180 bottom
R605 "10K" ERA-0805 90.33,21.75 r180 bottom
R606 "100R" ERA-0805 83.98,26.322 r270 bottom
R700 "1K" ERA-0805 15.908,62.771 r0 bottom
R701 "1K" ERA-0805 151.544,218.6 r90 bottom
R702 "1K" ERA-0805 22.576,62.771 r0 bottom
R703 "1K" ERA-0805 151.417,225.331 r90 bottom
R704 "1K" ERA-0805 3.843,64.93 r180 bottom
R705 "1K" ERA-0805 148.623,206.535 r270 bottom
R706 "1K" ERA-0805 15.908,69.333 r0 bottom
R707 "1K" ERA-0805 3.843,67.47 r180 bottom
R708 "1K" ERA-0805 144.94,218.6 r90 bottom
R709 "1K" ERA-0805 146.083,206.535 r270 bottom
R710 "1K" ERA-0805 3.843,70.01 r180 bottom
R711 "1K" ERA-0805 143.543,206.535 r270 bottom
R712 "1K" ERA-0805 3.843,72.55 r180 bottom
R713 "1K" ERA-0805 141.003,206.535 r270 bottom
R714 "1K" ERA-0805 3.843,75.09 r180 bottom
R715 "1K" ERA-0805 22.576,69.333 r0 bottom
R716 "1K" ERA-0805 138.463,206.535 r270 bottom
R717 "1K" ERA-0805 144.841,225.268 r90 bottom
R718 "1K" ERA-0805 3.843,77.63 r180 bottom
R719 "680R" ERA-0805 135.923,206.535 r270 bottom
R720 "1K" ERA-0805 3.843,80.17 r180 bottom
R721 "680R" ERA-0805 133.383,206.535 r270 bottom
R722 "1K" ERA-0805 3.843,82.71 r180 bottom
R723 "680R" ERA-0805 130.843,206.535 r270 bottom
R724 "1K" ERA-0805 15.908,75.894 r0 bottom
R725 "1K" ERA-0805 138.209,218.854 r90 bottom
R726 "1K" ERA-0805 22.576,75.894 r0 bottom
R727 "1K" ERA-0805 138.152,225.395 r90 bottom
R728 "1K" ERA-0805 15.908,82.456 r0 bottom
R729 "1K" ERA-0805 131.478,218.854 r90 bottom
R730 "1K" ERA-0805 22.576,82.456 r0 bottom
R731 "1K" ERA-0805 131.478,225.331 r90 bottom
R800 "47R" ERA-0603 217.043,286.639 r0 top
R801 "47R" ERA-0603 216.535,281.051 r0 top
R802 "47R" ERA-0603 217.932,275.082 r0 top
R803 "47R" ERA-0603 212.344,269.621 r0 top
R804 "47R" ERA-0603 221.742,268.224 r180 bottom
R805 "47R" ERA-0603 230.886,282.956 r90 top
R806 "47R" ERA-0603 229.87,279.019 r180 top
R807 "1K" ERA-0603 244.856,282.448 r180 top
R808 "1K" ERA-0603 244.856,286.004 r180 top
R809 "22K" ERA-0603 198.501,259.334 r270 bottom
R810 "22K" ERA-0603 203.501,259.334 r270 bottom
R811 "22K" ERA-0603 208.407,259.334 r270 bottom
R812 "22K" ERA-0603 213.614,259.334 r270 bottom
R813 "4K7" ERA-0603 201.041,260.858 r90 bottom
R814 "4K7" ERA-0603 206.067,260.858 r90 bottom
R815 "4K7" ERA-0603 210.983,260.858 r90 bottom
R816 "4K7" ERA-0603 216.118,260.858 r90 bottom
R817 "4K7" ERA-0603 221.125,260.921 r90 bottom
R818 "4K7" ERA-0603 226.06,260.858 r90 bottom
R819 "4K7" ERA-0603 231.194,260.858 r90 bottom
R820 "4K7" ERA-0603 236.202,260.731 r90 bottom
R821 "22K" ERA-0603 233.68,259.207 r90 bottom
R822 "22K" ERA-0603 228.854,259.334 r90 bottom
R823 "22K" ERA-0603 223.6,259.334 r90 bottom
R824 "22K" ERA-0603 218.487,259.397 r90 bottom
R825 "4R7" RD3.2x1.7 240.03,265.811 r90 top
S600 "HW_RESET" IT-2175 89.695,22.806 r270 top
U200 "LM324AN" N014 20.48,45.419 r270 top
U201 "LM358AP" P008 132.875,110.65 r0 top
U202 "MCP4822-E/SN" PDIP300-P8 144.94,110.65 r90 top
U300 "SN74HC595N" N016 94.775,71.026 r0 top
U301 "PIC16F1517" PDIP600-P40 72.677,49.563 r180 top
U400 "SN54ALS244CJ" J020 125.255,28.1 r0 top
U401 "SN54ALS244CJ" J020 125.255,50.389 r0 top
U402 "SN54ALS244CJ" J020 125.255,71.026 r0 top
U500 "SN74ALS374N" N020D 25.116,169.22 r0 top
U501 "ULN2003L" L16_N 50.516,168.966 r0 bottom
U502 "SN74ALS374N" N020D 88.2,218.996 r180 top
U503 "ULN2003L" L16_N 66.356,218.234 r180 bottom
U600 "MC34063AD" 626-05 30.299,29.751 r90 top
U601 "MC78L05ACP" 29-04#1 41.435,14.257 r0 top
U700 "SN74ALS374N" N020D 34.577,74.328 r90 top
U701 "SN74ALS374N" N020D 140.241,237.269 r180 top
U800 "MC74HC595AD" 751B-05_N 204.216,271.653 r0 top
U801 "HCF4051BM1" SO16_N 204.216,271.653 r0 bottom
U802 "MC78L05ABP" 29-04#2 239.522,273.558 r180 top
U803 "PIC12F675T-I/SN" SOIC-SN8_N 204.089,284.353 r180 top
Y300 "8MHz" HC49/4H_SMX 91.567,58.039 r0 top

## Footprints (in the part's own frame and the unit in brackets; to place one, negate y for a bottom-side part, rotate by r counter-clockwise, add the part's x,y. Pads: shape width x height; smd on the part's side, far side on the other; paste and mask are expansions set on the pad)
3.5X2.8X1.9 [mm] "SM LED; 2 C-Bend Leads; Body 3.5 x 2.8 x 1.9 mm, inc leads (LxWxH typ)"
  rect 1.5x2.6 smd: 1(-1.5,0) 2(1.5,0)
  silkscreen extent -2.65,-1.7 2.95,1.7
29-04#1 [mm] "TO, Flat Index; 3 In-Line, Axial Leads; Body Dia. 4.8mm; Leads 0.48 x 0.5 mm (max)"
  oval 2x1 hole 0.8: 1(0,-1.27) 2(0,0) 3(0,1.27)
  silkscreen extent -2.6,-2.6 1.6,2.6
29-04#2 [mm] "TO, Flat Index; 3 In-Line, Axial Leads; Body Dia. 4.8mm; Leads 0.48 x 0.51 mm (max)"
  oval 2x1 hole 0.9: 1(0,-1.27) 2(0,0) 3(0,1.27)
  silkscreen extent -2.65,-2.65 1.55,2.65
"40.31 FINDER" [mm] "FINDER RELAY 40.31 12V"
  round 3 hole 1.5: 1(3,9.95) 2(3,2.45) 3(19.5,2.45) 4(23,9.95) 5(26.5,2.45)
  silkscreen extent 0.1,0.1 29.1,12.5
94SP-C [mm] "Capacitor, Electrolytic, Radial; Body 6.3 x 6.8 mm (Dia.xH typ); Pin Spacing 2.5 mm (typ)"
  rect 1.5x1.5 hole 0.9: 1(-1.25,0)
  round 1.5 hole 0.9: 2(1.25,0)
  silkscreen extent -3.15,-3.15 3.15,3.15
0402 [mm] "Chip Capacitor; Body 1.0 x 0.5 mm (LxW typ)"
  rect 0.9x0.7 smd: 1(-0.65,0) 2(0.65,0)
  silkscreen extent -1.4,-0.25 -1.4,0.25
626-05 [mm] "DIP; 8 Leads; Row Spacing 7.62 mm; Pitch 2.54 mm"
  rect 1.5x1.5 hole 0.9: 1(-3.81,-3.81)
  round 1.5 hole 0.9: 2(-1.27,-3.81) 3(1.27,-3.81) 4(3.81,-3.81) 5(3.81,3.81) 6(1.27,3.81) 7(-1.27,3.81) 8(-3.81,3.81)
  silkscreen extent -5.15,-2.65 5.15,2.65
751B-05_N [mm] "SOIC, 16-Leads, Body 9.9x3.9mm, Pitch 1.27mm, IPC Medium Density"
  oval 2.2x0.6 smd: 1(-2.4,4.445) 2(-2.4,3.175) 3(-2.4,1.905) 4(-2.4,0.635) 5(-2.4,-0.635) 6(-2.4,-1.905) 7(-2.4,-3.175) 8(-2.4,-4.445) 9(2.4,-4.445) 10(2.4,-3.175) 11(2.4,-1.905) 12(2.4,-0.635) 13(2.4,0.635) 14(2.4,1.905) 15(2.4,3.175) 16(2.4,4.445)
  silkscreen extent -2.52,-5 0.9,5.42, body extent -2,-5 2,5, height 1.75
0805 [mm] "Chip Capacitor; Body 2.0 x 1.2 mm (LxW typ)"
  rect 1.3x1.5 smd: 1(-0.95,0) 2(0.95,0)
  silkscreen extent -1.9,-0.65 -1.9,0.65
1206 [mm] "Chip Capacitor; Body 3.2 x 1.6 mm (LxW typ)"
  rect 1.6x1.8 smd: 1(-1.4,0) 2(1.4,0)
  silkscreen extent -0.3,-0.8 0.3,0.8
B [mm] "Capacitor, Electrolytic, Radial; Body 5 x 6.8 mm (Dia.xH typ); Pin Spacing 2 mm (typ)"
  rect 1.25x1.25 hole 0.75: 1(-1,0)
  round 1.25 hole 0.75: 2(1,0)
  silkscreen extent -2.5,-2.5 2.5,2.5
C [mm] "Capacitor, Electrolytic, Radial; Body 6.3 x 6.8 mm (Dia.xH typ); Pin Spacing 2.5 mm (typ)"
  rect 1.25x1.25 hole 0.75: 1(-1.25,0)
  round 1.25 hole 0.75: 2(1.25,0)
  silkscreen extent -3.15,-3.15 3.15,3.15
CAPPR2-5X11 [mm] "Capacitor, Electrolytic, Radial; Body 5 x 11 mm (Dia.xH typ); Pin Spacing 2 mm (typ)"
  rect 1.35x1.35 hole 0.8: 1(-1,0)
  round 1.35 hole 0.8: 2(1,0)
  silkscreen extent -2.5,-2.5 2.5,2.5
CAPPR2.5-6.3X7 [mm] "Capacitor, Electrolytic, Radial; Body 6.3 x 7 mm (Dia.xH typ); Pin Spacing 2.5 mm (typ)"
  rect 1.25x1.25 hole 0.75: 1(-1.25,0)
  round 1.25 hole 0.75: 2(1.25,0)
  silkscreen extent -3.15,-3.15 3.15,3.15
E [mm] "Capacitor, Electrolytic, Radial; Body 8 x 10.5 mm (Dia.xH typ); Pin Spacing 3.5 mm (typ)"
  rect 1.5x1.5 hole 0.9: 1(-1.75,0)
  round 1.5 hole 0.9: 2(1.75,0)
  silkscreen extent -4,-4 4,4
E-11(R) [mm] "LED, 7-Segment Display, 10.92 mm, RHD; 14 Leads (3 Absent); Row Space 7.62 mm; Pitch 2.54 mm"
  rect 1.5x1.5 hole 0.9: 1(-3.81,7.62)
  round 1.5 hole 0.9: 2(-3.81,5.08) 3(-3.81,2.54) 6(-3.81,-5.08) 7(-3.81,-7.62) 8(3.81,-7.62) 9(3.81,-5.08) 10(3.81,-2.54) 11(3.81,0) 13(3.81,5.08) 14(3.81,7.62)
  silkscreen extent -7.13,-9.7 6.35,9.7
ERA-0603 [mm] "Chip Resistor; Body 1.6 x 0.8 mm (LxW typ)"
  rect 1.1x1 smd: 1(-0.85,0) 2(0.85,0)
ERA-0805 [mm] "Chip Resistor; Body 2 x 1.3 mm (LxW typ)"
  rect 1.3x1.5 smd: 1(-0.95,0) 2(0.95,0)
HC49/4H_SMX [mm] "Surface Mount Quartz Crystal; Body 13.4 (inc. leads) x 4.9 mm (LxW max)"
  rect 5.5x2 smd: 1(-4.75,0) 2(4.75,0)
  silkscreen extent -5.7,-2.45 5.7,2.45
HDR1X4 [mm] "Connector; Header; 4 Position"
  rect 1.5x1.5 hole 0.9: 1(0,0)
  round 1.5 hole 0.9: 2(2.54,0) 3(5.08,0) 4(7.62,0)
  silkscreen extent -1.27,-1.27 8.89,1.27
HDR1X5 [mm] "Connector; Header; 5 Position"
  rect 1.5x1.5 hole 0.9: 1(0,0)
  round 1.5 hole 0.9: 2(2.54,0) 3(5.08,0) 4(7.62,0) 5(10.16,0)
  silkscreen extent -1.27,-1.27 11.43,1.27
HDR1X6 [mm] "Connector; Header; 6 Position"
  rect 1.5x1.5 hole 0.9: 1(0,0)
  round 1.5 hole 0.9: 2(2.54,0) 3(5.08,0) 4(7.62,0) 5(10.16,0) 6(12.7,0)
  silkscreen extent -1.27,-1.27 13.97,1.27
HDR1X9 [mm] "Connector; Header; 9 Position"
  rect 1.5x1.5 hole 0.9: 1(0,0)
  round 1.5 hole 0.9: 2(2.54,0) 3(5.08,0) 4(7.62,0) 5(10.16,0) 6(12.7,0) 7(15.24,0) 8(17.78,0) 9(20.32,0)
  silkscreen extent -1.27,-1.27 21.59,1.27
HDR2X5 [mm] "Connector; Header; 5x2 Position"
  rect 1.5x1.5 hole 0.9: 1(0,0)
  round 1.5 hole 0.9: 2(0,2.54) 3(2.54,0) 4(2.54,2.54) 5(5.08,0) 6(5.08,2.54) 7(7.62,0) 8(7.62,2.54) 9(10.16,0) 10(10.16,2.54)
  silkscreen extent -1.27,-1.27 11.43,3.81
HDR2X6 [mm] "Connector; Header; 6x2 Position"
  rect 1.5x1.5 hole 0.9: 1(0,0)
  round 1.5 hole 0.9: 2(0,2.54) 3(2.54,0) 4(2.54,2.54) 5(5.08,0) 6(5.08,2.54) 7(7.62,0) 8(7.62,2.54) 9(10.16,0) 10(10.16,2.54) 11(12.7,0) 12(12.7,2.54)
  silkscreen extent -1.27,-1.27 13.97,3.81
HDR2X7 [mm] "Connector; Header; 7x2 Position"
  rect 1.5x1.5 hole 0.9: 1(0,0)
  round 1.5 hole 0.9: 2(0,2.54) 3(2.54,0) 4(2.54,2.54) 5(5.08,0) 6(5.08,2.54) 7(7.62,0) 8(7.62,2.54) 9(10.16,0) 10(10.16,2.54) 11(12.7,0) 12(12.7,2.54) 13(15.24,0) 14(15.24,2.54)
  silkscreen extent -1.27,-1.27 16.51,3.81
HDR2X7_CEN [mm] "Connector; Header; 7x2 Position"
  rect 1.5x1.5 hole 0.9: 1(0,0)
  round 1.5 hole 0.9: 2(2.54,0) 3(5.08,0) 4(7.62,0) 5(10.16,0) 6(12.7,0) 7(15.24,0) 8(0,2.54) 9(2.54,2.54) 10(5.08,2.54) 11(7.62,2.54) 12(10.16,2.54) 13(12.7,2.54) 14(15.24,2.54)
  silkscreen extent -1.27,-1.27 16.51,3.81
HDR2X8 [mm] "Connector; Header; 8x2 Position"
  rect 1.5x1.5 hole 0.9: 1(0,0)
  round 1.5 hole 0.9: 2(0,2.54) 3(2.54,0) 4(2.54,2.54) 5(5.08,0) 6(5.08,2.54) 7(7.62,0) 8(7.62,2.54) 9(10.16,0) 10(10.16,2.54) 11(12.7,0) 12(12.7,2.54) 13(15.24,0) 14(15.24,2.54) 15(17.78,0) 16(17.78,2.54)
  silkscreen extent -1.27,-1.27 19.05,3.81
IT-2175 [mm] "Switch, Push Button, Thru-Hole; 4 Leads; Body 8.5 x 8.5 mm (LxW typ); Row Spacing 9.0 mm; Pitch 4.5 mm"
  rect 1.65x1.65 hole 1: 1(-4.5,-2.25)
  round 1.65 hole 1: 2(4.5,-2.25) 3(-4.5,2.25) 4(4.5,2.25)
  silkscreen extent -4.25,-4.25 4.25,4.25
J020 [mm] "DIP; 20 Leads; Row Spacing 7.62 mm; Pitch 2.54 mm"
  rect 1.5x1.5 hole 0.9: 1(-11.43,-3.81)
  round 1.5 hole 0.9: 2(-8.89,-3.81) 3(-6.35,-3.81) 4(-3.81,-3.81) 5(-1.27,-3.81) 6(1.27,-3.81) 7(3.81,-3.81) 8(6.35,-3.81) 9(8.89,-3.81) 10(11.43,-3.81) 11(11.43,3.81) 12(8.89,3.81) 13(6.35,3.81) 14(3.81,3.81) 15(1.27,3.81) 16(-1.27,3.81) 17(-3.81,3.81) 18(-6.35,3.81) 19(-8.89,3.81) 20(-11.43,3.81)
  silkscreen extent -12.5,-2.65 12.5,2.65
L16_N [mm] "SOIC, 16-Leads, Body 9.9x3.9mm, Pitch 1.27mm, IPC Medium Density"
  oval 2.2x0.6 smd: 1(-2.4,4.445) 2(-2.4,3.175) 3(-2.4,1.905) 4(-2.4,0.635) 5(-2.4,-0.635) 6(-2.4,-1.905) 7(-2.4,-3.175) 8(-2.4,-4.445) 9(2.4,-4.445) 10(2.4,-3.175) 11(2.4,-1.905) 12(2.4,-0.635) 13(2.4,0.635) 14(2.4,1.905) 15(2.4,3.175) 16(2.4,4.445)
  silkscreen extent -2.52,-5 0.9,5.42, body extent -1.95,-4.95 1.95,4.95, height 1.75
LED-1 [mm] "LED; 2 Leads"
  round 1.6 hole 0.8: 1(0,1.27) 2(0,-1.27)
  silkscreen extent -2,-2.2 6.95,2.2
N014 [mm] "DIP; 14 Leads; Row Spacing 7.62 mm; Pitch 2.54 mm"
  rect 1.5x1.5 hole 0.9: 1(-7.62,-3.81)
  round 1.5 hole 0.9: 2(-5.08,-3.81) 3(-2.54,-3.81) 4(0,-3.81) 5(2.54,-3.81) 6(5.08,-3.81) 7(7.62,-3.81) 8(7.62,3.81) 9(5.08,3.81) 10(2.54,3.81) 11(0,3.81) 12(-2.54,3.81) 13(-5.08,3.81) 14(-7.62,3.81)
  silkscreen extent -9.85,-2.65 9.85,2.65
N016 [mm] "DIP; 16 Leads; Row Spacing 7.62 mm; Pitch 2.54 mm"
  rect 1.5x1.5 hole 0.9: 1(-8.89,-3.81)
  round 1.5 hole 0.9: 2(-6.35,-3.81) 3(-3.81,-3.81) 4(-1.27,-3.81) 5(1.27,-3.81) 6(3.81,-3.81) 7(6.35,-3.81) 8(8.89,-3.81) 9(8.89,3.81) 10(6.35,3.81) 11(3.81,3.81) 12(1.27,3.81) 13(-1.27,3.81) 14(-3.81,3.81) 15(-6.35,3.81) 16(-8.89,3.81)
  silkscreen extent -9.85,-2.65 9.85,2.65
N020D [mm] "DIP; 20 Leads; Row Spacing 7.62 mm; Pitch 2.54 mm"
  rect 1.5x1.5 hole 0.9: 1(-11.43,-3.81)
  round 1.5 hole 0.9: 2(-8.89,-3.81) 3(-6.35,-3.81) 4(-3.81,-3.81) 5(-1.27,-3.81) 6(1.27,-3.81) 7(3.81,-3.81) 8(6.35,-3.81) 9(8.89,-3.81) 10(11.43,-3.81) 11(11.43,3.81) 12(8.89,3.81) 13(6.35,3.81) 14(3.81,3.81) 15(1.27,3.81) 16(-1.27,3.81) 17(-3.81,3.81) 18(-6.35,3.81) 19(-8.89,3.81) 20(-11.43,3.81)
  silkscreen extent -12.5,-2.65 12.5,2.65
P008 [mm] "DIP; 8 Leads; Row Spacing 7.62 mm; Pitch 2.54 mm"
  rect 1.5x1.5 hole 0.9: 1(-3.81,-3.81)
  round 1.5 hole 0.9: 2(-1.27,-3.81) 3(1.27,-3.81) 4(3.81,-3.81) 5(3.81,3.81) 6(1.27,3.81) 7(-1.27,3.81) 8(-3.81,3.81)
  silkscreen extent -5.5,-2.65 5.5,2.65
PCMC063T [mm] "SM Inductor; 2 Leads; Body 7.3x6.6mm (LxW)"
  rect 1.95x3.2 smd: 1(-2.925,0) 2(2.925,0)
  silkscreen extent -3.65,-3.4 3.65,3.4, body extent -3.65,-3.4 3.65,3.4, height 3
PDIP300-P8 [mm] "DIP, 8-Leads, Row Spacing 7.62mm, Pitch 2.54mm, Body 9.5x6.6mm"
  rect 1.5x1.5 hole 0.9: 1(-3.81,3.81)
  round 1.5 hole 0.9: 2(-3.81,1.27) 3(-3.81,-1.27) 4(-3.81,-3.81) 5(3.81,-3.81) 6(3.81,-1.27) 7(3.81,1.27) 8(3.81,3.81)
  silkscreen extent -3.93,-4.9 2.65,5.23, body extent -3.55,-4.9 3.55,4.9, height 5.34
PDIP600-P40 [mm] "DIP, 40-Leads, Row Spacing 15.24mm, Pitch 2.54mm, Body 51.8x13.5mm"
  rect 1.5x1.5 hole 0.9: 1(-7.62,24.13)
  round 1.5 hole 0.9: 2(-7.62,21.59) 3(-7.62,19.05) 4(-7.62,16.51) 5(-7.62,13.97) 6(-7.62,11.43) 7(-7.62,8.89) 8(-7.62,6.35) 9(-7.62,3.81) 10(-7.62,1.27) 11(-7.62,-1.27) 12(-7.62,-3.81) 13(-7.62,-6.35) 14(-7.62,-8.89) 15(-7.62,-11.43) 16(-7.62,-13.97) 17(-7.62,-16.51) 18(-7.62,-19.05) 19(-7.62,-21.59) 20(-7.62,-24.13) 21(7.62,-24.13) 22(7.62,-21.59) 23(7.62,-19.05) 24(7.62,-16.51) 25(7.62,-13.97) 26(7.62,-11.43) 27(7.62,-8.89) 28(7.62,-6.35) 29(7.62,-3.81) 30(7.62,-1.27) 31(7.62,1.27) 32(7.62,3.81) 33(7.62,6.35) 34(7.62,8.89) 35(7.62,11.43) 36(7.62,13.97) 37(7.62,16.51) 38(7.62,19.05) 39(7.62,21.59) 40(7.62,24.13)
  silkscreen extent -7.75,-26.85 6.45,26.85, body extent -7.3,-26.85 7.3,26.85, height 6.35
Poti [mm]
  round 2 hole 1: 1(-2.5,-1.25) 2(2.5,-1.25) 3(0,1.25)
  silkscreen extent -5,-2.5 5,2.5
RB5-10.5 [mm] "Capacitor (Radial); 2 Leads"
  round 1.5 hole 0.9: 1(-2.5,0) 2(2.5,0)
  silkscreen extent -5.25,-5.25 5.25,5.25
RD3.2x1.7 [mm] "Resistor, Axial; Body 3.4 x 1.9 mm (LxDia. max), Lead Dia. 0.5 mm (max)"
  round 1.35 hole 0.8: 1(-3.25,0) 2(3.25,0)
  silkscreen extent -1.7,-0.95 1.7,0.95
SO16_N [mm] "SOIC, 16-Leads, Body 9.9x3.9mm, Pitch 1.27mm, IPC Medium Density"
  oval 2.2x0.6 smd: 1(-2.4,4.445) 2(-2.4,3.175) 3(-2.4,1.905) 4(-2.4,0.635) 5(-2.4,-0.635) 6(-2.4,-1.905) 7(-2.4,-3.175) 8(-2.4,-4.445) 9(2.4,-4.445) 10(2.4,-3.175) 11(2.4,-1.905) 12(2.4,-0.635) 13(2.4,0.635) 14(2.4,1.905) 15(2.4,3.175) 16(2.4,4.445)
  silkscreen extent -2.52,-5 0.9,5.42, body extent -1.95,-4.95 1.95,4.95, height 1.75
SOD68 [mm] "Diode, Axial; Body 3 x 1.6 mm (LxDia. max), Lead Dia. 0.55 mm (max)"
  round 1.5 hole 0.9: 1(-3.175,0)
  rect 1.5x1.5 hole 0.9: 2(3.175,0)
  silkscreen extent -1.55,-0.8 1.65,0.8
SOD80C [mm] "Metal Electrode Face (MELF) Diode; Body 3.5 x 1.6 mm (LxDia)"
  rect 1.25x1.7 smd: 1(-1.775,0) 2(1.775,0)
  silkscreen extent -0.85,-0.75 0.85,0.75
SOIC-SN8_N [mm] "SOIC, 8-Leads, Body 4.9x3.8mm, Pitch 1.27mm, IPC Medium Density"
  oval 2.2x0.6 smd: 1(-2.4,1.905) 2(-2.4,0.635) 3(-2.4,-0.635) 4(-2.4,-1.905) 5(2.4,-1.905) 6(2.4,-0.635) 7(2.4,0.635) 8(2.4,1.905)
  silkscreen extent -2.53,-2.5 0.9,2.88, body extent -2,-2.5 2,2.5, height 1.75
SOT23_N [mm] "SOT23, 3-Leads, Body 2.9x1.3mm, Pitch 0.95mm, Lead Span 2.3mm, IPC Medium Density"
  rect 1.3x0.6 smd: 1(-1.05,0.95) 2(-1.05,-0.95) 3(1.05,0)
  silkscreen extent -1.17,-1.5 0.7,1.92, body extent -0.7,-1.5 0.7,1.5, height 1.1
SOT223_N [mm] "SOT223, 4-Leads, Body 6.5x3.5mm, Pitch 2.3mm, Lead Span 7mm, IPC Medium Density"
  rect 2.2x1 smd: 1(-3,2.3) 2(-3,0) 3(-3,-2.3)
  rect 2.2x3.3 smd: 4(3,0)
  silkscreen extent -3.12,-3.35 1.6,3.47, body extent -1.85,-3.35 1.85,3.35, height 1.8
"TERMINAL BLOK" [mm] "Terminal konektor 3 pina"
  round 2.5 hole 0.762: 1(0,5.08) 2(0,0) 3(0,-5.08)
  silkscreen extent -4,-7.5 4,7.5
"TERMINAL BLOK 2" [mm] "Terminal blok 2 pina"
  round 2.5 hole 0.762: 1(0,-2.5) 2(0,2.5)
  silkscreen extent -4,-5 4.13,5

## Part data
C100 C101 C102 C103 C104 C105 C106 C107 C108 C200 C202 C203 C204 C205 C206 C207 C208 C210 C211 C212 C300 C301 C400 C401 C402 C403 C404 C405 C406 C407 C408 C409 C410 C411 C412 C413 C414 C415 C416 C417 C418 C419 C420 C421 C422 C423 C424 C425 C426 C427 C428 C429 C500 C501 C601 C602 C603 C607 C609 C610 C700 C701: library part C1206, "Ceramic Chip Capacitor - Standard"
C201 C209 C302 C600 C606: library part 94SA107X0010EBP, "Solid Aluminum Capacitor with Organic Semiconductor Electrolyte: 100uF, 10V, Bulk Pack"
C303 C304: library part C0402, "Ceramic Chip Capacitor - Standard"
C604 C608: library part EKA00AA210L00, "Aluminum Electrolytic Capacitor, Radial Style with Long Leads: 10uF, 100V"
C605 C800 C801 C804 C805 C806: library part C0805, "Ceramic Chip Capacitor - Standard"
C802: library part 94SC106X0025CBP, "Solid Aluminum Capacitor with Organic Semiconductor Electrolyte: 10uF, 25V, Bulk Pack"
C803: library part 94SC225X0030BBP, "Solid Aluminum Capacitor with Organic Semiconductor Electrolyte: 2.2uF, 30V, Bulk Pack"
D100: library part "D Zener", "Zener Diode"
D300: library part LED3, "Typical BLUE SiC LED"
D400 D401 D402 D403 D404 D405 D406 D407 D408 D409 D410 D411 D412 D413 D414 D415 D416 D417 D418 D419 D420 D421 D422 D423: library part BZV85-C5V1, "Voltage Regulator Diode"
D500 D501 D502 D503 D504 D505 D506 D507 D508 D509 D510 D511 D512 D513 D514 D515: "Typical RED GaAs LED"
D600: "Schottky Barrier Diode"
D601 D602: "General-purpose Diode"
D700 D701 D702 D703 D704 D705 D706 D707: library part LED1, "Typical RED GaAs LED"
DS800 DS801: "10.92 mm HER 7-Segment Display: CC, RH DP"
K500 K501 K502 K503 K504 K505 K506 K507 K508 K509 K510 K511 K512 K513 K514 K515: library part "FINDER 40.31"
L600 L601: library part PCMC063T-1R0MN, "SMT Power Choke Coil; Size 7.3×6.6×3.0mm, ±20% Tolerance, 1.0uH, 11A"
L602: library part PCMC063T-R82MN, "SMT Power Choke Coil; Size 7.3×6.6×3.0mm, ±20% Tolerance, 0.82uH, 13A"
P100 P101: "Header, 9-Pin"
P102 P200 P201 P202 P204 P510 P511 P512 P516 P518 P519 P600 P800 P803: library part "Terminal blok 2 pina", "Terminal blok 2"
P203 P205: "Header, 5-Pin, Dual row"
P300: "Header, 6-Pin"
P301: "Header, 4-Pin"
P302: "Header, 5-Pin"
P400 P401 P402 P403 P404 P405 P406 P407 P408 P409 P410 P411 P412 P413 P414: "Terminal blok 2"
P415 P703 P704: "Header, 6-Pin, Dual row"
P500 P503 P514 P517: "Header, 7-Pin, Dual row"
P501 P502 P504 P505 P506 P507 P508 P509 P513 P515 P801 P802: library part "Terminal blok 3 pina", "Terminal blok"
P700 P701 P702: "Header, 8-Pin, Dual row"
Q500 Q502 Q800 Q801: "NPN General-purpose Transistor"
Q501 Q503: "NPN Medium Power Transistor"
Q700 Q701 Q702 Q703 Q704 Q705 Q706 Q707 Q708 Q709 Q710 Q711 Q712 Q713 Q714 Q715: library part BC337-16, "Amplifier Transistor NPN Silicon"
R100 R101 R102 R103 R104 R105 R106: library part POTI
R107 R108 R109 R204 R206 R208 R211 R213 R215 R217 R219 R300 R301 R302 R303 R304 R305 R306 R307 R308 R309 R310 R311 R312 R400 R401 R402 R403 R404 R405 R406 R407 R408 R409 R410 R411 R412 R413 R414 R415 R416 R417 R418 R419 R420 R421 R422 R423 R424 R425 R426 R427 R428 R429 R430 R431 R432 R433 R434 R435 R436 R437 R438 R439 R440 R441 R442 R443 R444 R445 R446 R447 R448 R449 R450 R451 R452 R453 R700 R701 R702 R703 R704 R705 R706 R707 R708 R709 R710 R711 R712 R713 R714 R715 R716 R717 R718 R719 R720 R721 R722 R723 R724 R725 R726 R727 R728 R729 R730 R731: library part ERA6Y, "Rectangular Thick Film Chip Resistor, 10 Ohm to 1M Ohm Range, 0.1% and 0.5% Tolerance, 0805 Size, 0.1 W"
R200 R201 R202 R203 R205 R207 R209 R210 R212 R214 R216 R218 R500 R501 R502 R503 R504 R505 R506 R507 R508 R509 R510 R511 R512 R513 R514 R515 R516 R517 R600 R601 R602 R603 R604 R605 R606: library part ERAS, "Metal Film Thermosensitive Chip Resistor, 0.56 Ohm to 10k Ohm Range, 5% Tolerance, 0805 Size, 0.1 W"
R313 R800 R801 R802 R803 R804 R805 R806 R807 R808 R809 R810 R811 R812 R813 R814 R815 R816 R817 R818 R819 R820 R821 R822 R823 R824: library part ERA3Y, "Rectangular Thick Film Chip Resistor, 10 Ohm to 330k Ohm Range, 0.1% and 0.5% Tolerance, 0603 Size, 0.063 W"
R825: library part ERD6FC, "Flame-Retardant Fuse Type Carbon Film Resistor, 4.7 Ohm to 1k Ohm Range, 2% and 5% Tolerance, 0.166 W"
S600: library part IT-2175, "Tactile Switch, DPST; Thru-Hole; Vertical; Rating DC 12V, 50mA (max)"
U200: "Quadruple Operational Amplifier"
U201: "Dual Operational Amplifier"
U202: "12-Bit DACs with Internal VREF and SPI Interface, 8-Pin SOIC 150mil, Extended Temperature"
U300: "8-Bit Shift Register with 3-State Output Registers"
U301: library part PIC18F4520-E/P, "Enhanced Flash Microcontroller with 10-Bit A/D and nanoWatt Technology, 32K Flash, 40-Pin PDIP, Extended Temperature Range"
U400 U401 U402: "Octal Buffer/Driver with 3-State Outputs"
U500 U502 U700 U701: "Octal D-Type Edge-Triggered Flip-Flop with 3-State Outputs"
U501 U503: "High-Voltage, High-Current Darlington Array"
U600: "DC-to-DC Converter Control Circuit"
U601: "3-Terminal Low-Current Positive Fixed Voltage Regulator"
U800: "8-Bit Serial-Input/Serial or Prallel-Output Shift Register with Latched 3-State Outputs"
U801: "Analog Multiplexer/Demultiplexer"
U802: "Three-Terminal Low Current Positive Voltage Regulator"
U803: "FLASH-Based 8-Bit CMOS Microcontroller, 10-Bit A/D, 8-Pin SOIC 150mil, Industrial Temperature, Tape and Reel"
Y300: library part HC49/4H_SMX, "Surface Mount Quartz Crystal"

## Via types
v1: diameter 1.27, hole 0.711, Top Layer to Bottom Layer, 154 vias